# Altium PCB PCB1.PcbDoc
Units mil, origin at the board's own origin, x right, y up, seen from the top; angles counter-clockwise.
Board outline 6000 x 4000 mil, 2 copper layers (Top Layer, Bottom Layer); 33 components, 0 nets, 94 pads, 4 vias.
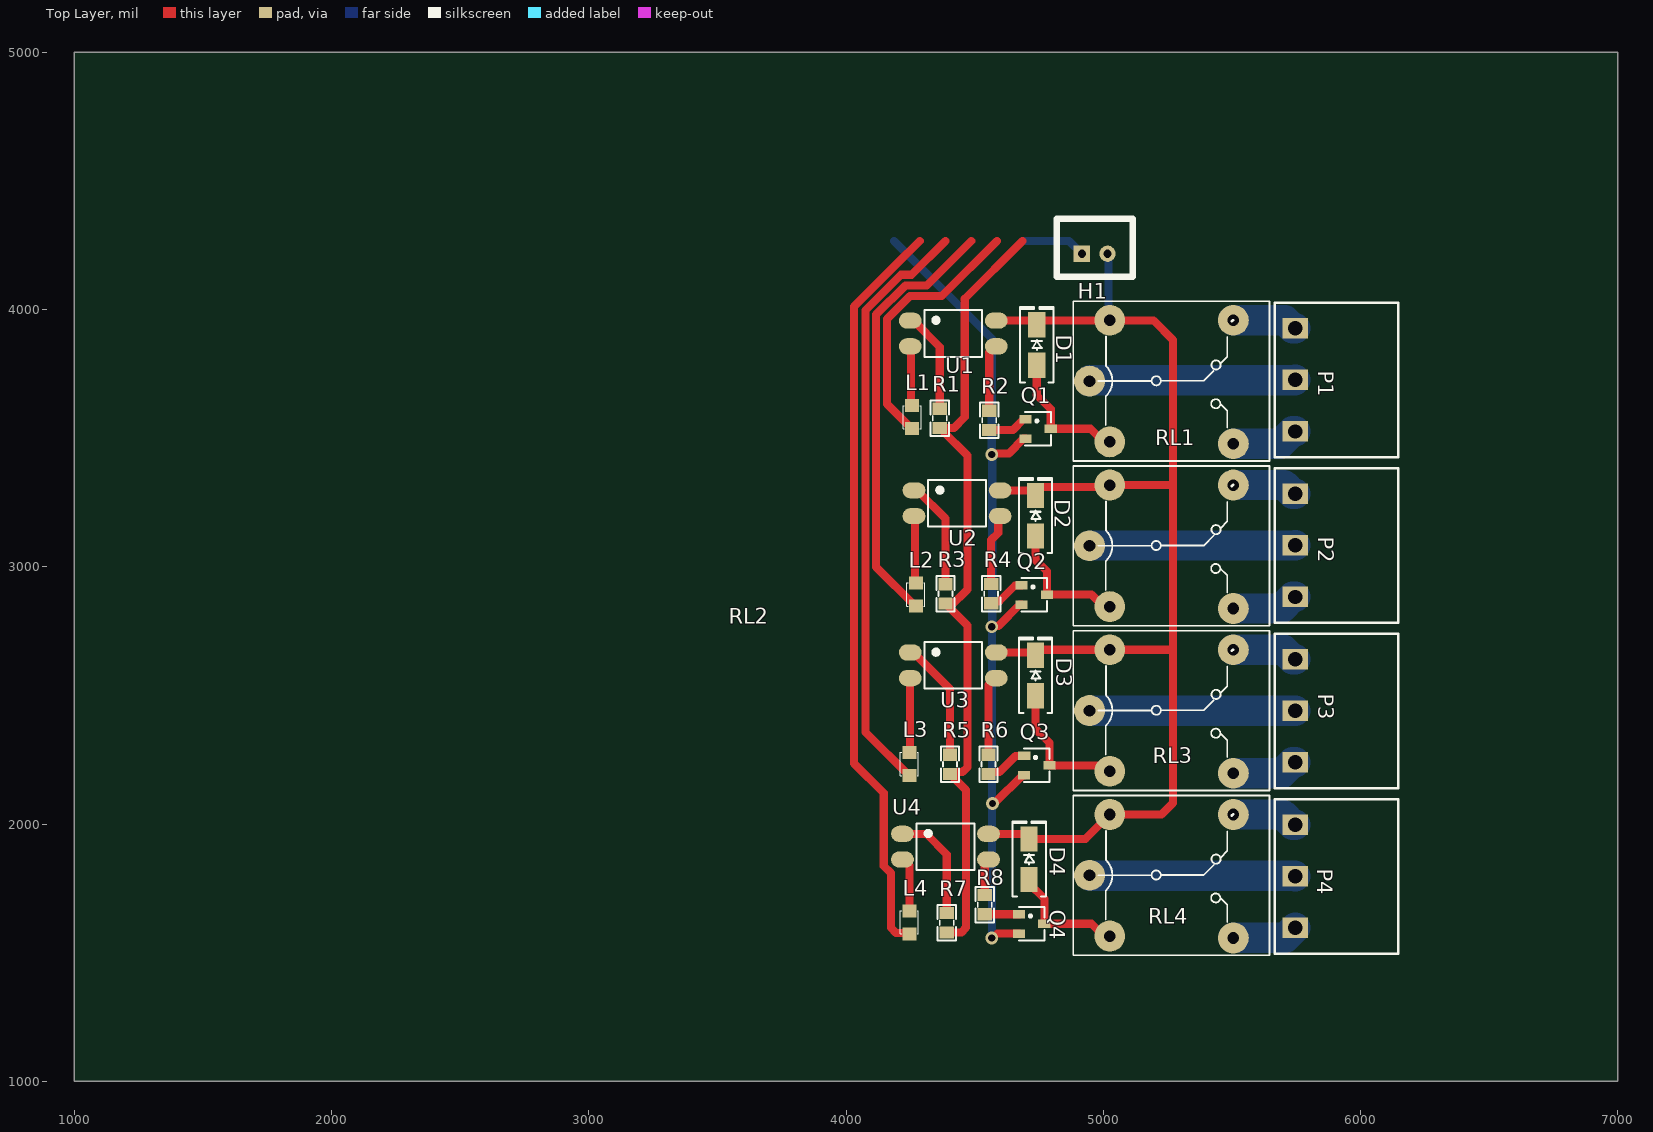
[diagram p0: Top Layer view]
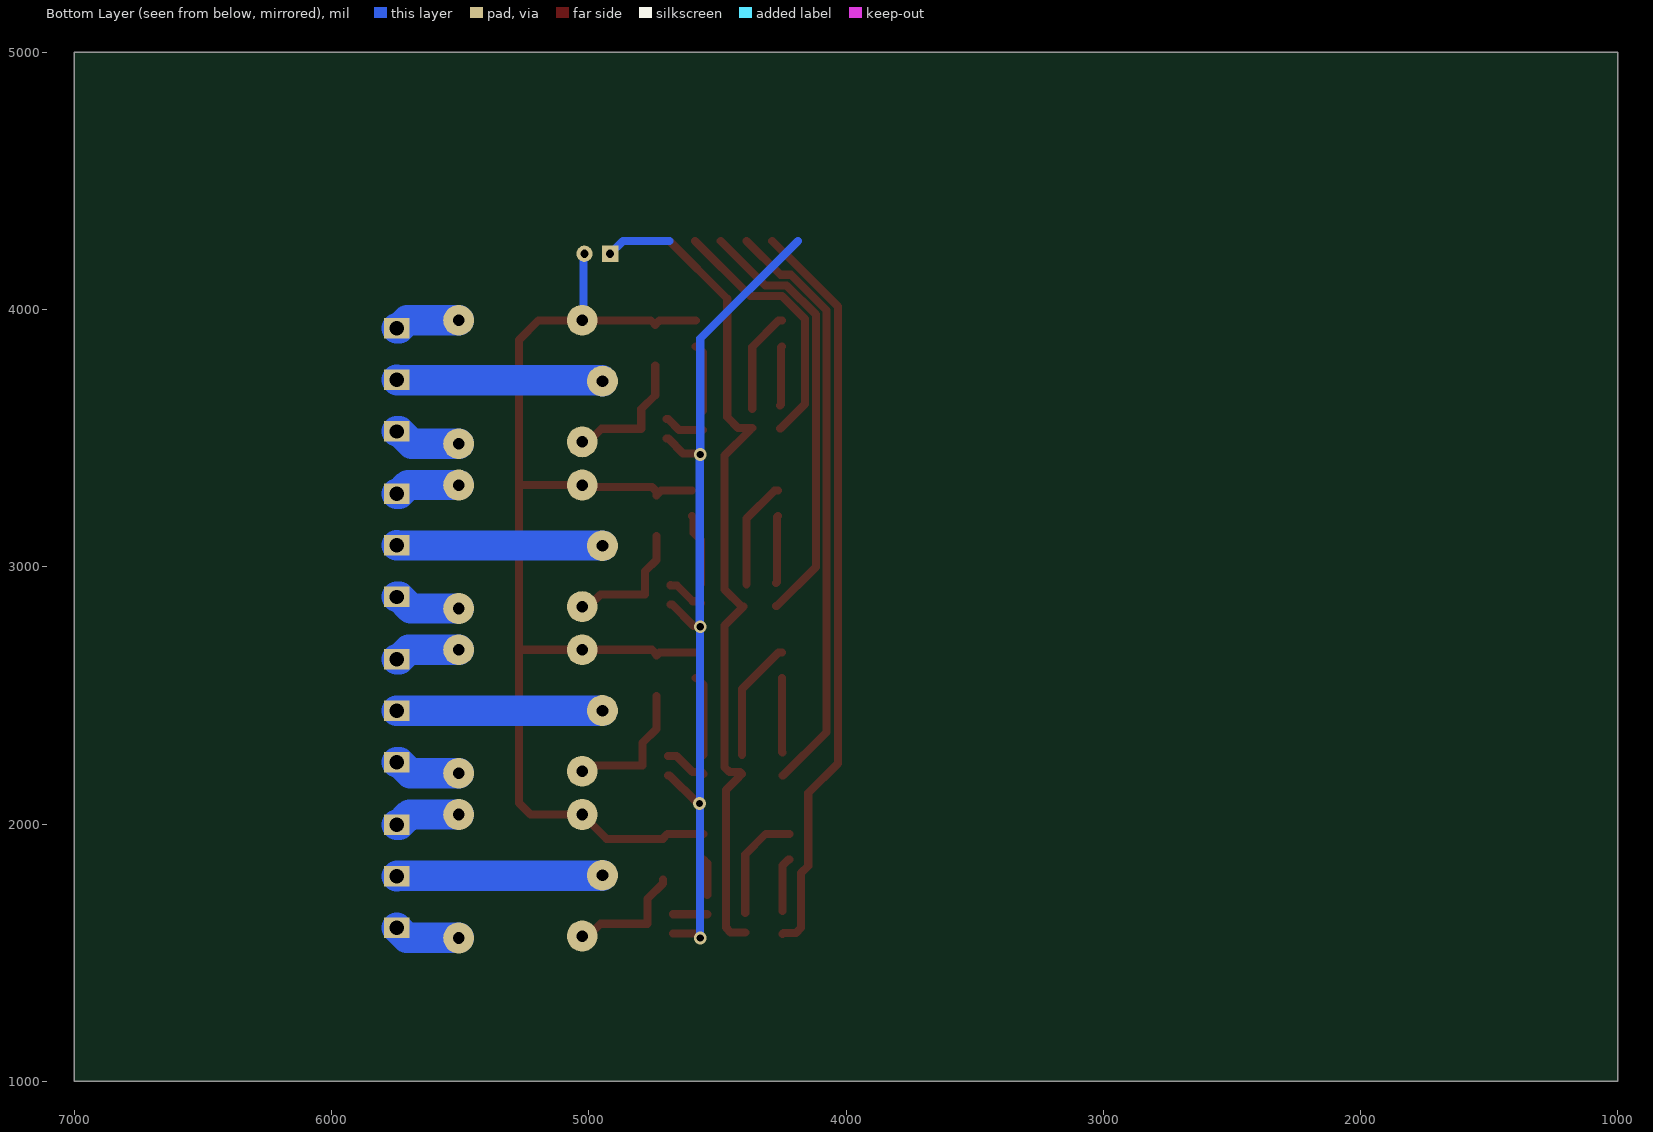
[diagram p1: Bottom Layer view, seen from below]

## Layer stack, top to bottom
Top Solder: solder mask 0.4, Solder Resist, Dk 3.5
Top Layer: signal copper 1.4
Dielectric 1: dielectric 12.6, FR-4, Dk 4.8
Bottom Layer: signal copper 1.4
Bottom Solder: solder mask 0.4, Solder Resist, Dk 3.5

## Board outline
1000,1000 7000,1000 7000,5000 1000,5000

## Design rules (kind name [scope] priority, off if disabled: settings)
Clearance [All] p1: gap=10 ignorepadtopadclearanceinfootprint=FALSE except(0: Arc-Hole Track-Hole SMDPad-Hole THPad-Hole Via-Hole Fill-Hole Poly-Hole Region-Hole Text-Hole)
PolygonConnect [All] p1: connectstyle=Relief reliefconductorwidth=10 reliefentries=4 polygonreliefangle="90 Angle" airgapwidth=10
RoutingVias [All] p1: holewidth=28 width=50 viastyle="Through Hole" minholewidth=28 minwidth=50 maxholewidth=28 maxwidth=50
SolderMaskExpansion [All] p1: expansion=4 istentingtop=FALSE
Width [All] p1: maxlimit=10 minlimit=10 preferedwidth=10
30 further rules are at their usual default settings.

## Components (designator, comment, footprint, x,y, rotation, side; value= is the part's Value field where it differs from the comment)
D1 "SS34" "DIODE SMA" 4741.73,3861.89 r90 top
D2 "SS34" "DIODE SMA" 4736.73,3198.15 r90 top
D3 "SS34" "DIODE SMA" 4736.73,2576.89 r90 top
D4 "SS34" "DIODE SMA" 4711.73,1862.99 r90 top
H1 "Header 2P 2.54 Duc Thang" XH2.54M-2 4916.73,4216.89 r0 top
L1 "LED 0805" LED-0805-Red 4256.73,3626.89 r270 top
L2 "LED 0805" LED-0805-Red 4271.73,2936.89 r270 top
L3 "LED 0805" LED-0805-Red 4246.73,2278.06 r270 top
L4 "LED 0805" LED-0805-Red 4246.73,1662.38 r270 top
P1 "CON 3 EDG5.08" "CON 3 3EDG5.08" 5746.73,3926.89 r270 top
P2 "CON 3 EDG5.08" "CON 3 3EDG5.08" 5746.73,3283.56 r270 top
P3 "CON 3 EDG5.08" "CON 3 3EDG5.08" 5746.73,2640.22 r270 top
P4 "CON 3 EDG5.08" "CON 3 3EDG5.08" 5746.73,1996.89 r270 top
Q1 "BC817" SOT-23 4746.73,3536.89 r270 top value=C9014
Q2 "BC817" SOT-23 4731.73,2891.89 r270 top value=C9014
Q3 "BC817" SOT-23 4741.73,2228.06 r270 top value=C9014
Q4 "BC817" SOT-23 4721.73,1612.38 r270 top value=C9014
R1 "1k" "tro smd 0805" 4366.73,3576.89 r270 top
R2 "510k" "tro smd 0805" 4559.13,3569.46 r270 top
R3 "1k" "tro smd 0805" 4389.13,2894.66 r270 top
R4 "510k" "tro smd 0805" 4566.73,2895.72 r270 top
R5 "1k" "tro smd 0805" 4406.73,2231.89 r270 top
R6 "510k" "tro smd 0805" 4556.73,2231.89 r270 top
R7 "1k" "tro smd 0805" 4394.13,1616.21 r270 top
R8 "510k" "tro smd 0805" 4541.73,1686.89 r270 top
RL1 "Relay" "Relay 5 Chan SRD" 4946.73,3721.89 r0 top
RL2 "Relay" "Relay 5 Chan SRD" 4946.73,3081.48 r0 top
RL3 "Relay" "Relay 5 Chan SRD" 4946.73,2441.08 r0 top
RL4 "Relay" "Relay 5 Chan SRD" 4946.73,1800.67 r0 top
U1 "OPTO PC817 SMD" SOP4 4416.73,3906.89 r0 top value=PC817
U2 "OPTO PC817 SMD" SOP4 4431.73,3246.89 r0 top value=PC817
U3 "OPTO PC817 SMD" SOP4 4416.73,2616.89 r0 top value=PC817
U4 "OPTO PC817 SMD" SOP4 4386.73,1911.89 r0 top value=PC817

## Footprints (in the part's own frame and the unit in brackets; to place one, negate y for a bottom-side part, rotate by r counter-clockwise, add the part's x,y. Pads: shape width x height; smd on the part's side, far side on the other; paste and mask are expansions set on the pad)
"CON 3 3EDG5.08" [mm]
  rect 2x2.5 hole 1.4: 1(0,0) 2(5.08,0) 3(10.173,0)
  silkscreen extent -2.54,-2.03 12.71,10.16, body extent -2.5,-1.75 12.67,10.25, height 3.15
"DIODE SMA" [mm] "SMA"
  rect 2.5x1.7 smd: 1(-2,0) 2(2,0)
  silkscreen extent -3.68,-1.65 3.75,1.65, body extent -2.6,-1.37 2.6,1.37, height 2.4
LED-0805-Red [mil]
  rect 50x55 smd: 1(0,0) 2(90,0)
  silkscreen extent 0,-35 90,35, body extent 5,-25 85,25, height 43
"Relay 5 Chan SRD" [mil] "Relay SPDT, 5 pin, 10A,W 650mil, L 800mil, H 800mil"
  round 120 hole 45: 1(0,0) 2(559.06,236.22) 3(559.06,-243.78) 4(78.74,-236.22) 5(78.74,236.22)
  silkscreen extent -63,-311 700,310, body extent -55,-306 697,304, height 602
SOP4 [mm]
  oval 2.25x1.6 smd: 1(-4.25,1.27) 2(-4.25,-1.27) 3(4.25,-1.27) 4(4.25,1.27)
  silkscreen extent -2.85,-2.3 2.85,2.3, body extent -4.67,-2.29 4.93,2.31, height 3.6
SOT-23 [mm] "SOT 23 _ 1-3-2"
  rect 0.85x1.2 smd: 1(-0.94,-1.245) 2(0.985,-1.25) 3(0.005,1.25)
  silkscreen extent -1.65,-1.27 1.65,1.27, body extent -1.47,-1.33 1.53,1.17, height 1.06
"tro smd 0805" [mm]
  rect 1.2x1.4 smd: 1(-0.946,-0.061) 2(0.954,-0.061)
  silkscreen extent -1.75,-0.97 1.75,0.84, body extent -1.56,-0.76 1.44,0.64, height 0.53
XH2.54M-2 [mm]
  rect 1.6x1.6 hole 0.8: 1(0,0)
  round 1.6 hole 0.8: 2(2.54,0)
  silkscreen extent -2.48,-2.26 5.02,3.46, body extent -2.48,-2.26 5.02,3.48, height 6.91

## Part data
D1 D2 D3 D4: library part "Diode SS34 ( 1N5822 )", "Dán", Chung_Loai=Dán, Don_Vi=Con, Ma_Hang=MH002104, Ten_Linh_Kien="Diode SS34 3A 40V SMA ( 1N5822 SS34A)"
H1 P1 P2 P3 P4: "Cắm", Chung_Loai=Cắm, Don_Vi=Con
  H1: Ma_Hang=MH001283, Ten_Linh_Kien="Header 2P XH2.54-2P Đực Thẳng"
  P1 P2 P3 P4: Ma_Hang=MH000760, Ten_Linh_Kien="CON 3 2EDG5.08-3P 5.08MM ( Xanh Cong)"
L1 L2 L3 L4: library part "LED 0805 Do", "Dán", Chung_Loai=Dán, Don_Vi=Con, Ma_Hang=MH000897, Ten_Linh_Kien="LED 0805 Màu Đỏ (Red)"
Q1 Q2 Q3 Q4: library part "Trans BC817", "SOT-23 - C8658"
R1 R3 R5 R7: library part "Tro 0805 1% 1k", "Dán", Chung_Loai=Dán, Don_Vi=Con, Ma_Hang=MH005468, So_Chan=2, Ten_Linh_Kien="Trở 0805 1% 1k"
R2 R4 R6 R8: library part "Tro 0805 1% 510k", "Dán", Chung_Loai=Dán, Don_Vi=Con, Ma_Hang=MH005486, So_Chan=2, Ten_Linh_Kien="Trở 0805 1% 510k"
RL1 RL2 RL3 RL4: library part "Relay 5 Chan SRD", "Relay 5 Chan", Ma_Hang=MH009374, Ten="Relay 5V10A SRD-05VDC-SL-C Chính Hãng"
U1 U2 U3 U4: "Single Opto"

## Via types
v1: diameter 50, hole 28, Top Layer to Bottom Layer, 4 vias

## Nets (pads, with @x,y where several pads share a name; then routed paths per layer and width w, separated by ;. In a path a pad name is that pad's centre, name@x,y a point inside that pad or via, vN(x,y) a via of type N, cw(c..) or ccw(c..) an arc to the next point about the centre after c; other vN are vias at no path point)
pads on no net: D1.1 D1.2 D2.1 D2.2 D3.1 D3.2 D4.1 D4.2 H1.1 H1.2 L1.1 L1.2 L2.1 L2.2 L3.1 L3.2 L4.1 L4.2 P1.1 P1.2 P1.3 P2.1 P2.2 P2.3 P3.1 P3.2 P3.3 P4.1 P4.2 P4.3 Q1.1 Q1.2 Q1.3 Q2.1 Q2.2 Q2.3 Q3.1 Q3.2 Q3.3 Q4.1 Q4.2 Q4.3 R1.1 R1.2 R2.1 R2.2 R3.1 R3.2 R4.1 R4.2 R5.1 R5.2 R6.1 R6.2 R7.1 R7.2 R8.1 R8.2 RL1.1 RL1.2 RL1.3 RL1.4 RL1.5 RL2.1 RL2.2 RL2.3 RL2.4 RL2.5 RL3.1 RL3.2 RL3.3 RL3.4 RL3.5 RL4.1 RL4.2 RL4.3 RL4.4 RL4.5 U1.1 U1.2 U1.3 U1.4 U2.1 U2.2 U2.3 U2.4 U3.1 U3.2 U3.3 U3.4 U4.1 U4.2 U4.3 U4.4
copper on no net: | length 31341.9
  Top Layer w31.5: 4219.41,1861.89 4223.68,1861.89 4246.73,1838.84 4246.73,1662.38 ; 4219.41,1961.89 4311.73,1961.89 4391.73,1881.89 4391.73,1653.44 ; 4246.73,1572.38 4242.44,1576.67 4194.71,1576.67 4174.76,1596.61 4174.76,1809.11 4146.77,1837.1 4146.77,2120.67 4031.57,2235.87 4031.57,4011.73 4196.73,4176.89 4286.73,4266.89 ; 4246.73,2188.06 4244.23,2188.06 4075.67,2356.62 4075.67,3997.14 4213.92,4135.39 4255.24,4135.39 4386.73,4266.89 ; 4246.73,2278.06 4248.07,2279.39 4248.07,2565.55 4249.41,2566.89 ; 4249.41,2666.89 4262.2,2666.89 4404.34,2524.76 4404.34,2269.12 ; 4249.41,3856.89 4253.07,3853.23 4253.07,3630.55 4256.73,3626.89 ; 4249.41,3956.89 4262.2,3956.89 4364.34,3854.76 4364.34,3614.12 ; 4256.73,3536.89 4254.23,3536.89 4158.66,3632.46 4158.66,3962.77 4248.3,4052.4 4372.24,4052.4 4586.73,4266.89 ; 4264.41,3196.89 4268.07,3193.23 4268.07,2940.55 4271.73,2936.89 ; 4264.41,3296.89 4277.2,3296.89 4386.73,3187.36 4386.73,2931.89 ; 4271.73,2846.89 4269.23,2846.89 4117.17,2998.96 4117.17,3979.95 4231.11,4093.9 4313.74,4093.9 4486.73,4266.89 ; 4364.34,3539.32 4364.43,3539.41 4376.15,3539.41 4419.25,3539.41 4461.73,3581.89 4461.73,4041.89 4686.73,4266.89 ; 4368.28,3539.32 4376.15,3531.44 4376.15,3527.5 4471.73,3431.92 4471.73,2911.89 4405.12,2845.28 4398.54,2845.28 4471.73,2772.09 4471.73,2220.64 4453.28,2202.19 4416.15,2202.19 4412.21,2202.19 4404.34,2194.32 4408.28,2194.32 4416.15,2186.44 4416.15,2182.5 4466.73,2131.92 4466.73,1597.09 4448.28,1578.64 4391.73,1578.64 ; 4539.37,1649.35 4672.7,1649.35 ; 4539.34,1724.12 4539.34,1847.34 4553.89,1861.89 4554.06,1861.89 ; 4554.06,1961.89 4694.02,1961.89 4711.73,1944.17 4711.73,1941.73 4930.32,1941.73 5025.47,2036.89 5226.73,2036.89 5271.73,2081.89 5271.73,3317.7 ; 4554.34,2194.32 4562.21,2202.19 4597.03,2202.19 4658.91,2264.07 4691.75,2264.07 4692.73,2265.06 ; 4554.34,2269.12 4554.34,2541.45 4579.78,2566.89 4584.06,2566.89 ; 4556.73,3531.89 4648.84,3531.89 4690.84,3573.89 4697.73,3573.89 ; 4556.73,3606.69 4556.73,3833.84 4579.78,3856.89 4584.06,3856.89 ; 4564.34,2858.15 4572.21,2866.02 4595.87,2866.02 4657.75,2927.91 4681.75,2927.91 4682.73,2928.89 ; 4564.34,2932.95 4564.34,3104.5 4591.73,3131.89 4591.73,3189.57 4599.06,3196.89 ; v1(4566.73,2766.89) 4570.27,2770.43 4592.97,2770.43 4675.63,2853.09 4682.52,2853.09 ; v1(4566.73,3436.89) 4570.27,3440.43 4632.97,3440.43 4690.63,3498.09 4697.52,3498.09 ; v1(4569.23,2079.4) 4572.77,2082.94 4579.31,2082.94 4685.63,2189.26 4692.52,2189.26 ; 4584.06,2666.89 4725.47,2666.89 4736.73,2655.63 4736.73,2659.58 4754.45,2677.3 5025.47,2677.3 5266.73,2677.3 ; 4584.06,3956.89 4725.47,3956.89 4741.73,3940.63 4759.21,3958.11 5025.47,3958.11 ; 4588.43,1573.58 4672.52,1573.58 ; 4599.06,3296.89 4719.02,3296.89 4736.73,3279.17 ; 4711.73,1784.25 4711.73,1768.5 4770.95,1709.29 4770.95,1612.18 4953.8,1612.18 5001.52,1564.45 5025.47,1564.45 ; 4736.73,2498.15 4736.73,2369.93 4790.95,2315.72 4790.95,2227.85 4978.52,2227.85 5001.52,2204.86 5025.47,2204.86 ; 4736.73,3119.41 4736.73,3026.89 4780.95,2982.68 4780.95,2891.69 4955.1,2891.69 5001.52,2845.26 5025.47,2845.26 ; 4736.73,3276.89 4736.73,3279.17 ; 4741.73,3783.15 4741.73,3666.85 4795.95,3612.64 4795.95,3536.69 4950.5,3536.69 5001.52,3485.67 5025.47,3485.67 ; 5016.73,4221.89 5018.6,4220.02 ; 5023.6,3959.98 5025.47,3958.11 ; 4736.73,3279.17 4736.73,3292.64 4754.45,3310.35 5018.12,3310.35 5025.47,3317.7 5271.73,3317.7 ; 5025.47,3958.11 5195.51,3958.11 5271.73,3881.89 5271.73,3317.7
  Top Layer w59.06: 4947.68,1800.67 4949.57,1798.78 ; 5744.84,1798.78 5746.73,1796.89
  Bottom Layer w31.5: 4186.73,4266.89 4566.73,3886.89 v1(4566.73,3436.89) ; v1(4566.73,1556.89) 4567.98,1558.14 4567.98,2078.15 v1(4569.23,2079.4) 4567.98,2080.65 4567.98,2765.64 v1(4566.73,2766.89) 4568.61,2768.76 v1@4568.61,3433.76 ; 4686.73,4266.89 4866.73,4266.89 4916.73,4216.89 ; 5016.73,4216.89 5021.1,4212.52 5021.1,3962.48 5025.47,3958.11
  Bottom Layer w118.11: 4946.73,1800.67 4948.62,1798.78 5744.84,1798.78 5746.73,1796.89 ; 4946.73,2441.08 4947.16,2440.65 5746.31,2440.65 5746.73,2440.22 ; 4946.73,3081.48 4947.77,3082.52 5745.7,3082.52 5746.73,3083.56 ; 4946.73,3721.89 4949.23,3724.39 5744.23,3724.39 5746.73,3726.89 ; 5505.79,1556.89 5506.15,1557.25 5707.59,1557.25 5746.73,1596.39 ; 5505.79,2036.89 5696.89,2036.89 5736.89,1996.89 5746.73,1996.89 ; 5505.79,2197.3 5694.46,2197.3 5736.89,2239.72 5746.73,2239.72 ; 5505.79,2677.3 5699.82,2677.3 5736.89,2640.22 5746.73,2640.22 ; 5505.79,2837.7 5691.54,2837.7 5736.89,2883.06 5746.73,2883.06 ; 5505.79,3317.7 5702.74,3317.7 5736.89,3283.56 5746.73,3283.56 ; 5505.79,3478.11 5688.61,3478.11 5736.89,3526.39 5746.73,3526.39 ; 5505.79,3958.11 5705.67,3958.11 5736.89,3926.89 5746.73,3926.89